# EAGLE board board1616_1servo_smallx4 (EAGLE 9.6.2)
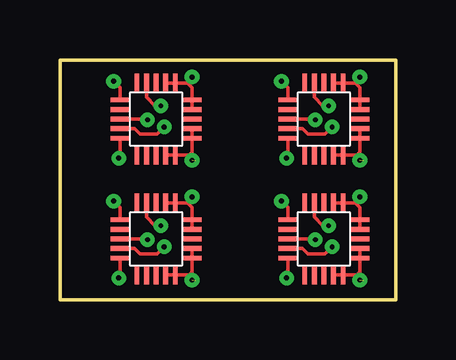
[diagram p0: board, top side]
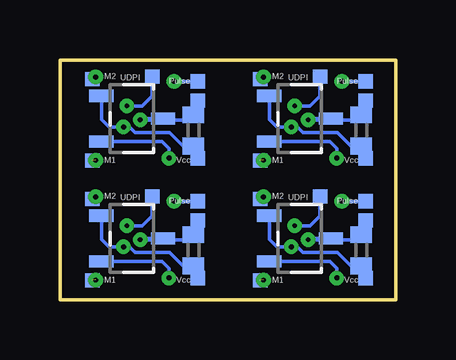
[diagram p1: board, bottom side, seen from below]

Size 14 x 10 mm. Coordinates in mm from the lower left corner, seen from the top.
Outline: 0,10 14,10 14,0 0,0 0,10
Copper layers (1*16): Top 0.035mm / dielectric 1.5mm / Bottom 0.035mm
Design rules "default": minimum track width 6mil, minimum drill 0.35mm, track to track 6mil, track to pad 6mil, pad to pad 6mil, via to via 6mil, smd to smd 6mil, copper to edge 40mil, drill to drill 6mil, minimum pad ring 10mil, minimum via ring 8mil, stop-mask expansion 4mil, vias tented up to drill 0mil, thermal gap 10mil

## Footprints (pad centres in the part's own frame; a part is rotated, then mirrored left to right if it is on the bottom)
C0402 = smd 0.7 x 0.9: 1 -0.65,0; 2 0.65,0
TP06SQ = smd 0.6 x 0.6: TP 0,0
SOT23-W = smd 0.508 x 1.016: 1 -0.953,-1.27; 2 0.953,-1.27; 3 0,1.3
QFN203X3 = smd 0.8 x 0.2: 1 -0.6,-0.1; 2 -0.6,-0.5; 3 -0.6,-0.9; 4 -0.6,-1.3; 5 -0.6,-1.7; 11 2.4,-1.7; 12 2.4,-1.3; 13 2.4,-0.9; 14 2.4,-0.5; 15 2.4,-0.1 | smd 0.2 x 0.8: 6 0.1,-2.4; 7 0.5,-2.4; 8 0.9,-2.4; 9 1.3,-2.4; 10 1.7,-2.4; 16 1.7,0.6; 17 1.3,0.6; 18 0.9,0.6; 19 0.5,0.6; 20 0.1,0.6

## Placement (x,y rotation side)
C1  [C0402]  8.43,7.06 270 bottom
C2  [C0402]  1.43,7.06 270 bottom
C3  [C0402]  8.43,2.06 270 bottom
C4  [C0402]  1.43,2.06 270 bottom
GND1  TPTP06SQ  [TP06SQ]  1.25,8.3 0 bottom
GND2  TPTP06SQ  [TP06SQ]  8.25,8.3 0 bottom
GND3  TPTP06SQ  [TP06SQ]  8.25,3.3 0 bottom
GND4  TPTP06SQ  [TP06SQ]  1.25,3.3 0 bottom
IC1  A1302LH  [SOT23-W]  11,7.55 270 bottom
IC2  A1302LH  [SOT23-W]  4,7.55 270 bottom
IC3  A1302LH  [SOT23-W]  11,2.55 270 bottom
IC4  A1302LH  [SOT23-W]  4,2.55 270 bottom
SERVOIN1  TPTP06SQ  [TP06SQ]  1.25,9.1 0 bottom
SERVOIN2  TPTP06SQ  [TP06SQ]  8.25,9.1 0 bottom
SERVOIN3  TPTP06SQ  [TP06SQ]  8.25,4.1 0 bottom
SERVOIN4  TPTP06SQ  [TP06SQ]  1.25,4.1 0 bottom
TP1  TPTP06SQ  [TP06SQ]  1.25,5.9 0 bottom
TP2  TPTP06SQ  [TP06SQ]  8.25,5.9 0 bottom
TP3  TPTP06SQ  [TP06SQ]  12.65,9.2 0 bottom
TP4  TPTP06SQ  [TP06SQ]  12.65,5.8 0 bottom
TP5  TPTP06SQ  [TP06SQ]  10.15,9.3 0 bottom
TP6  TPTP06SQ  [TP06SQ]  5.65,9.2 0 bottom
TP7  TPTP06SQ  [TP06SQ]  5.65,5.8 0 bottom
TP8  TPTP06SQ  [TP06SQ]  3.15,9.3 0 bottom
TP9  TPTP06SQ  [TP06SQ]  8.25,0.9 0 bottom
TP10  TPTP06SQ  [TP06SQ]  12.65,4.2 0 bottom
TP11  TPTP06SQ  [TP06SQ]  12.65,0.8 0 bottom
TP12  TPTP06SQ  [TP06SQ]  10.15,4.3 0 bottom
TP13  TPTP06SQ  [TP06SQ]  1.25,0.9 0 bottom
TP14  TPTP06SQ  [TP06SQ]  5.65,4.2 0 bottom
TP15  TPTP06SQ  [TP06SQ]  5.65,0.8 0 bottom
TP16  TPTP06SQ  [TP06SQ]  3.15,4.3 0 bottom
U$1  ATTINY1616  [QFN203X3]  10.11,8.43 0 top
U$2  ATTINY1616  [QFN203X3]  3.11,8.43 0 top
U$3  ATTINY1616  [QFN203X3]  10.11,3.43 0 top
U$4  ATTINY1616  [QFN203X3]  3.11,3.43 0 top

## Library data of the parts
C1-C4 = rcl; SPICEPREFIX: C
GND1-GND4 SERVOIN1-SERVOIN4 TP1-TP16 = testpad
IC1-IC4 = allegro; MF: ALLEGRO MICROSYSTEMS, INC.; MPN: A1302ELHLT-T; OC_FARNELL: 1457209; OC_NEWARK: 31K6638
U$1-U$4 = atmel_tiny24-44-84tiny48-88mega48-88-168-328

## Nets
N$1: TP4.TP U$1.9 U$1.10 U$1.11 U$1.12
N$2: TP3.TP U$1.14 U$1.15 U$1.16 U$1.17
N$3: SERVOIN2.TP U$1.1
N$4: C1.1 GND2.TP IC1.3 U$1.3
N$5: TP7.TP U$2.9 U$2.10 U$2.11 U$2.12
N$6: C1.2 IC1.1 TP2.TP U$1.4
N$7: IC1.2 U$1.5
N$8: TP5.TP U$1.19
N$9: TP6.TP U$2.14 U$2.15 U$2.16 U$2.17
N$10: SERVOIN1.TP U$2.1
N$11: C2.1 GND1.TP IC2.3 U$2.3
N$12: C2.2 IC2.1 TP1.TP U$2.4
N$13: IC2.2 U$2.5
N$14: TP8.TP U$2.19
N$15: TP11.TP U$3.9 U$3.10 U$3.11 U$3.12
N$16: TP10.TP U$3.14 U$3.15 U$3.16 U$3.17
N$17: SERVOIN3.TP U$3.1
N$18: C3.1 GND3.TP IC3.3 U$3.3
N$19: C3.2 IC3.1 TP9.TP U$3.4
N$20: IC3.2 U$3.5
N$21: TP12.TP U$3.19
N$22: TP15.TP U$4.9 U$4.10 U$4.11 U$4.12
N$23: TP14.TP U$4.14 U$4.15 U$4.16 U$4.17
N$24: SERVOIN4.TP U$4.1
N$25: C4.1 GND4.TP IC4.3 U$4.3
N$26: C4.2 IC4.1 TP13.TP U$4.4
N$27: IC4.2 U$4.5
N$28: TP16.TP U$4.19

## Tracks (layer width: path | path; a pad name or v marks a point on that pad's centre or on a via)
N$1  (via drill 0.2)  (1 unrouted)
  Top 0.152: U$1.9 U$1.10 12.29,6.03 | 12.29,6.03 12.38,6.03 12.51,6.16 U$1.11 U$1.12 | 12.29,6.03 v12.51,5.81
N$2  (via drill 0.2)
  Top 0.152: U$1.14 U$1.15 12.51,8.84 12.4,8.95 | 12.4,8.95 12.32,9.03 U$1.16 U$1.17 | 12.4,8.95 12.4,9.18 v12.51,9.29
  Bottom 0.152: TP3.TP 12.56,9.29 v12.51,9.29
  Bottom 0.2: 12.59,9.26 TP3.TP
N$3  (via drill 0.2)
  Top 0.152: U$1.1 9.51,8.84 v9.24,9.11
  Bottom 0.127: SERVOIN2.TP
  Bottom 0.152: v9.24,9.11 v9.23,9.1 SERVOIN2.TP
N$4  (via drill 0.2)
  Top 0.152: v10.65,7.5 10.62,7.53 U$1.3
  Bottom 0.152: 8.46,8.09 GND2.TP 8.43,8.12 C1.1 8.64,7.5 v10.65,7.5 10.6,7.55 IC1.3
N$5  (via drill 0.2)  (1 unrouted)
  Top 0.152: U$2.9 U$2.10 5.29,6.03 | 5.29,6.03 5.38,6.03 5.51,6.16 U$2.11 U$2.12 | 5.29,6.03 v5.51,5.81
N$6  (via drill 0.2)
  Top 0.152: U$1.4 10.12,7.13 10.35,6.9 11.05,6.9 v11.35,7.2
  Bottom 0.152: TP2.TP 8.25,6.23 C1.2 8.86,6.41 9.42,6.97 10.87,6.97 11.1,7.2 v11.35,7.2 11.95,7.2 12.27,7.52 IC1.1
N$7  (via drill 0.2)
  Top 0.152: U$1.5 9.51,5.96 v9.45,5.9
  Bottom 0.152: IC1.2 9.75,6.6 9.45,6.3 v9.45,5.9
N$8  (via drill 0.2)
  Top 0.152: U$1.19 10.61,8.44 10.97,8.08 v11.21,8.08
  Bottom 0.152: v11.21,8.08 10.57,8.08 10.15,8.5 TP5.TP
N$9  (via drill 0.2)
  Top 0.152: U$2.14 U$2.15 5.51,8.84 5.4,8.95 | 5.4,8.95 5.32,9.03 U$2.16 U$2.17 | 5.4,8.95 5.4,9.18 v5.51,9.29
  Bottom 0.152: TP6.TP 5.56,9.29 v5.51,9.29
  Bottom 0.2: 5.59,9.26 TP6.TP
N$10  (via drill 0.2)
  Top 0.152: U$2.1 2.51,8.84 v2.24,9.11
  Bottom 0.127: SERVOIN1.TP
  Bottom 0.152: v2.24,9.11 v2.23,9.1 SERVOIN1.TP
N$11  (via drill 0.2)
  Top 0.152: v3.65,7.5 3.62,7.53 U$2.3
  Bottom 0.152: 1.46,8.09 GND1.TP 1.43,8.12 C2.1 1.64,7.5 v3.65,7.5 3.6,7.55 IC2.3
N$12  (via drill 0.2)
  Top 0.152: U$2.4 3.12,7.13 3.35,6.9 4.05,6.9 v4.35,7.2
  Bottom 0.152: TP1.TP 1.25,6.23 C2.2 1.86,6.41 2.42,6.97 3.87,6.97 4.1,7.2 v4.35,7.2 4.95,7.2 5.27,7.52 IC2.1
N$13  (via drill 0.2)
  Top 0.152: U$2.5 2.51,5.96 v2.45,5.9
  Bottom 0.152: IC2.2 2.75,6.6 2.45,6.3 v2.45,5.9
N$14  (via drill 0.2)
  Top 0.152: U$2.19 3.61,8.44 3.97,8.08 v4.21,8.08
  Bottom 0.152: v4.21,8.08 3.57,8.08 3.15,8.5 TP8.TP
N$15  (via drill 0.2)  (1 unrouted)
  Top 0.152: U$3.9 U$3.10 12.29,1.03 | 12.29,1.03 12.38,1.03 12.51,1.16 U$3.11 U$3.12 | 12.29,1.03 v12.51,0.81
N$16  (via drill 0.2)
  Top 0.152: U$3.14 U$3.15 12.51,3.84 12.4,3.95 | 12.4,3.95 12.32,4.03 U$3.16 U$3.17 | 12.4,3.95 12.4,4.18 v12.51,4.29
  Bottom 0.152: TP10.TP 12.56,4.29 v12.51,4.29
  Bottom 0.2: 12.59,4.26 TP10.TP
N$17  (via drill 0.2)
  Top 0.152: U$3.1 9.51,3.84 v9.24,4.11
  Bottom 0.127: SERVOIN3.TP
  Bottom 0.152: v9.24,4.11 v9.23,4.1 SERVOIN3.TP
N$18  (via drill 0.2)
  Top 0.152: v10.65,2.5 10.62,2.53 U$3.3
  Bottom 0.152: 8.46,3.09 GND3.TP 8.43,3.12 C3.1 8.64,2.5 v10.65,2.5 10.6,2.55 IC3.3
N$19  (via drill 0.2)
  Top 0.152: U$3.4 10.12,2.13 10.35,1.9 11.05,1.9 v11.35,2.2
  Bottom 0.152: TP9.TP 8.25,1.23 C3.2 8.86,1.41 9.42,1.97 10.87,1.97 11.1,2.2 v11.35,2.2 11.95,2.2 12.27,2.52 IC3.1
N$20  (via drill 0.2)
  Top 0.152: U$3.5 9.51,0.96 v9.45,0.9
  Bottom 0.152: IC3.2 9.75,1.6 9.45,1.3 v9.45,0.9
N$21  (via drill 0.2)
  Top 0.152: U$3.19 10.61,3.44 10.97,3.08 v11.21,3.08
  Bottom 0.152: v11.21,3.08 10.57,3.08 10.15,3.5 TP12.TP
N$22  (via drill 0.2)  (1 unrouted)
  Top 0.152: U$4.9 U$4.10 5.29,1.03 | 5.29,1.03 5.38,1.03 5.51,1.16 U$4.11 U$4.12 | 5.29,1.03 v5.51,0.81
N$23  (via drill 0.2)
  Top 0.152: U$4.14 U$4.15 5.51,3.84 5.4,3.95 | 5.4,3.95 5.32,4.03 U$4.16 U$4.17 | 5.4,3.95 5.4,4.18 v5.51,4.29
  Bottom 0.152: TP14.TP 5.56,4.29 v5.51,4.29
  Bottom 0.2: 5.59,4.26 TP14.TP
N$24  (via drill 0.2)
  Top 0.152: U$4.1 2.51,3.84 v2.24,4.11
  Bottom 0.127: SERVOIN4.TP
  Bottom 0.152: v2.24,4.11 v2.23,4.1 SERVOIN4.TP
N$25  (via drill 0.2)
  Top 0.152: v3.65,2.5 3.62,2.53 U$4.3
  Bottom 0.152: 1.46,3.09 GND4.TP 1.43,3.12 C4.1 1.64,2.5 v3.65,2.5 3.6,2.55 IC4.3
N$26  (via drill 0.2)
  Top 0.152: U$4.4 3.12,2.13 3.35,1.9 4.05,1.9 v4.35,2.2
  Bottom 0.152: TP13.TP 1.25,1.23 C4.2 1.86,1.41 2.42,1.97 3.87,1.97 4.1,2.2 v4.35,2.2 4.95,2.2 5.27,2.52 IC4.1
N$27  (via drill 0.2)
  Top 0.152: U$4.5 2.51,0.96 v2.45,0.9
  Bottom 0.152: IC4.2 2.75,1.6 2.45,1.3 v2.45,0.9
N$28  (via drill 0.2)
  Top 0.152: U$4.19 3.61,3.44 3.97,3.08 v4.21,3.08
  Bottom 0.152: v4.21,3.08 3.57,3.08 3.15,3.5 TP16.TP

## Text on the board
bNames: Pulse | UDPI | M2 | Pulse | UDPI | M2 | Vcc | M1 | Vcc | M1 | Pulse | UDPI | M2 | Pulse | UDPI | M2 | Vcc | M1 | Vcc | M1
bDocu: GND | GND | GND | GND